# EAGLE board robot_general_purpose_board (EAGLE 7.1.0)
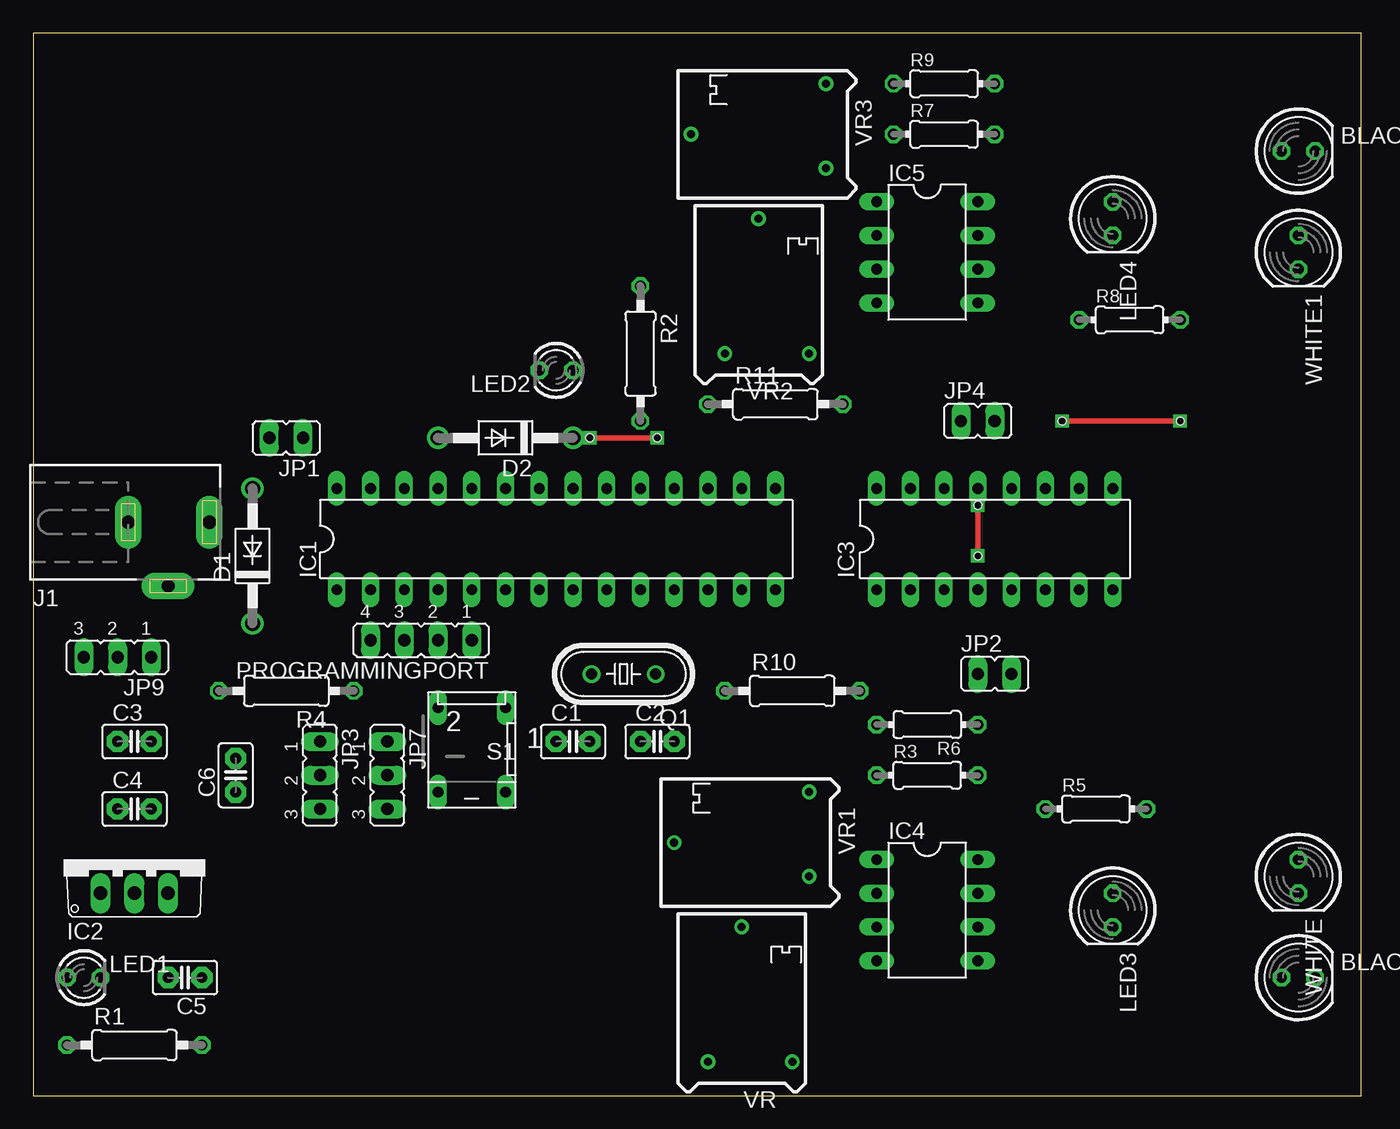
[diagram p0: board, top side]
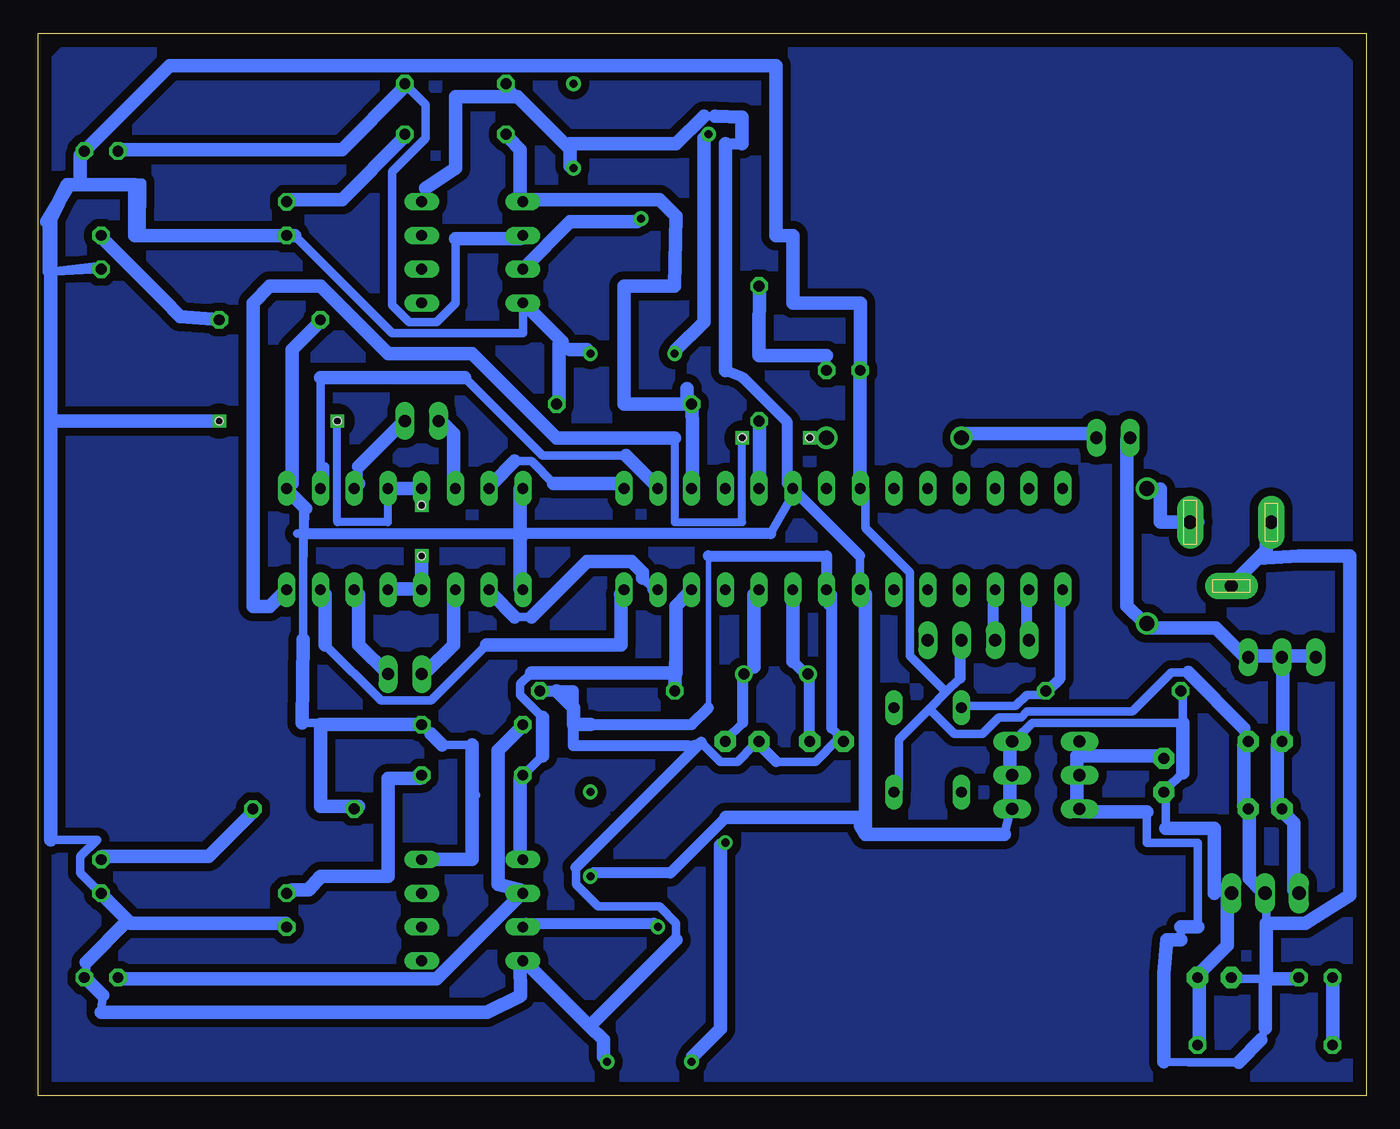
[diagram p1: board, bottom side, seen from below]

Size 100 x 80 mm. Coordinates in mm from the lower left corner, seen from the top.
Outline: 0,0 100,0 100,80 0,80 0,0
Copper layers (1*16): Top 0.035mm / dielectric 1.5mm / Bottom 0.035mm
Design rules "default *": minimum track width 25mil, minimum drill 24mil, track to track 8mil, track to pad 8mil, pad to pad 8mil, via to via 8mil, smd to smd 8mil, copper to edge 40mil, drill to drill 8mil, minimum pad ring 10mil, minimum via ring 8mil, stop-mask expansion 4mil, vias tented up to drill 0mil, thermal gap 10mil
Holes 0.6 mm at 41.91,49.53 46.99,49.53 71.12,44.45 71.12,40.64 77.47,50.8 86.36,50.8

## Footprints (pad centres in the part's own frame; a part is rotated, then mirrored left to right if it is on the bottom)
LED5MM = drill 0.813 octagon: A -1.27,0; K 1.27,0
C2.5-2 = drill 0.813 pad 1.6 octagon: 1 -1.27,0; 2 1.27,0
DO41-10 = drill 1.118: A 5.08,0; C -5.08,0
DIL28-3 = drill 0.813 long: 1 -16.51,-3.81; 2 -13.97,-3.81; 3 -11.43,-3.81; 4 -8.89,-3.81; 5 -6.35,-3.81; 6 -3.81,-3.81; 7 -1.27,-3.81; 8 1.27,-3.81; 9 3.81,-3.81; 10 6.35,-3.81; 11 8.89,-3.81; 12 11.43,-3.81; 13 13.97,-3.81; 14 16.51,-3.81; 15 16.51,3.81; 16 13.97,3.81; 17 11.43,3.81; 18 8.89,3.81; 19 6.35,3.81; 20 3.81,3.81; 21 1.27,3.81; 22 -1.27,3.81; 23 -3.81,3.81; 24 -6.35,3.81; 25 -8.89,3.81; 26 -11.43,3.81; 27 -13.97,3.81; 28 -16.51,3.81
TO220V = drill 1.016 long: 1 -2.54,-2.54; 2 0,-2.54; 3 2.54,-2.54
DIL16 = drill 0.813 long: 1 -8.89,-3.81; 2 -6.35,-3.81; 3 -3.81,-3.81; 4 -1.27,-3.81; 5 1.27,-3.81; 6 3.81,-3.81; 7 6.35,-3.81; 8 8.89,-3.81; 9 8.89,3.81; 10 6.35,3.81; 11 3.81,3.81; 12 1.27,3.81; 13 -1.27,3.81; 14 -3.81,3.81; 15 -6.35,3.81; 16 -8.89,3.81
DIL-08 = drill 0.813 long: 1 -3.81,-3.81; 2 -1.27,-3.81; 3 1.27,-3.81; 4 3.81,-3.81; 5 3.81,3.81; 6 1.27,3.81; 7 -1.27,3.81; 8 -3.81,3.81
DCJ0303 = drill 1 pad 2 long: 1 0,3.1; 2 4.8,0; 3 0,-3
JP1 = drill 0.914 long: 1 0,-1.27; 2 0,1.27
JP2 = drill 0.914 long: 1 -2.54,0; 2 0,0; 3 2.54,0
LED3MM = drill 0.813 octagon: A -1.27,0; K 1.27,0
JP4 = drill 0.914 long: 1 -3.81,0; 2 -1.27,0; 3 1.27,0; 4 3.81,0
HC49/S = drill 0.813: 1 -2.413,0; 2 2.413,0
0207/10 = drill 0.813 octagon: 1 -5.08,0; 2 5.08,0
0204/7 = drill 0.813 octagon: 1 -3.81,0; 2 3.81,0
DP-02 = drill 0.813 long: 1 -2.54,-2.54; 2 2.54,-2.54; 3 2.54,3.81; 4 -2.54,3.81
RTRIM64P = drill 0.61: 1 -2.54,-3.81; 2 7.62,0; 3 -2.54,2.54

## Placement (x,y rotation side)
BLACK  5mm  [LED5MM]  95.25,8.89 0 top
BLACK1  5mm  [LED5MM]  95.25,71.12 0 top
C1  22pf  [C2.5-2]  40.64,26.67 0 top
C2  22pf  [C2.5-2]  46.99,26.67 0 top
C3  470Uf  [C2.5-2]  7.62,26.67 0 top
C4  0.1uf  [C2.5-2]  7.62,21.59 0 top
C5  0.1uf  [C2.5-2]  11.43,8.89 180 top
C6  4.7uf  [C2.5-2]  15.24,24.13 90 top
D1  1N4007  [DO41-10]  16.51,40.64 90 top
D2  1N4007  [DO41-10]  35.56,49.53 180 top
IC1  ATMEGA328  [DIL28-3]  39.37,41.91 0 top
IC2  7805  [TO220V]  7.62,17.78 0 top
IC3  L293D  [DIL16]  72.39,41.91 0 top
IC4  358  [DIL-08]  67.31,13.97 270 top
IC5  358  [DIL-08]  67.31,63.5 270 top
J1  [DCJ0303]  10.16,43.18 270 top
JP1  [JP1]  19.05,49.53 90 top
JP2  [JP1]  72.39,31.75 270 top
JP3  0volt  [JP2]  21.59,24.13 270 top
JP4  [JP1]  71.12,50.8 270 top
JP7  +5v0lt  [JP2]  26.67,24.13 270 top
JP9  +12volt  [JP2]  6.35,33.02 180 top
LED1  [LED3MM]  3.81,8.89 0 top
LED2  [LED3MM]  39.37,54.61 180 top
LED3  5mm  [LED5MM]  81.28,13.97 270 top
LED4  5mm  [LED5MM]  81.28,66.04 270 top
PROGRAMMINGPORT  [JP4]  29.21,34.29 180 top
Q1  16MHZ  [HC49/S]  44.45,31.75 180 top
R1  220R  [0207/10]  7.62,3.81 0 top
R2  330R  [0207/10]  45.72,55.88 270 top
R3  1K  [0204/7]  67.31,24.13 0 top
R4  10K  [0207/10]  19.05,30.48 180 top
R5  1K  [0204/7]  80.01,21.59 0 top
R6  10K  [0204/7]  67.31,27.94 180 top
R7  1K  [0204/7]  68.58,72.39 0 top
R8  1K  [0204/7]  82.55,58.42 0 top
R9  10K  [0204/7]  68.58,76.2 0 top
R10  10K  [0207/10]  57.15,30.48 0 top
R11  10K  [0207/10]  55.88,52.07 0 top
S1  [DP-02]  33.02,26.67 180 top
VR  50k  [RTRIM64P]  53.34,5.08 90 top
VR1  100E  [RTRIM64P]  55.88,19.05 180 top
VR2  50k  [RTRIM64P]  54.61,58.42 90 top
VR3  100E  [RTRIM64P]  57.15,72.39 180 top
WHITE  5mm  [LED5MM]  95.25,16.51 270 top
WHITE1  5mm  [LED5MM]  95.25,63.5 270 top

## Library data of the parts
BLACK BLACK1 LED1-LED4 WHITE WHITE1 = led
C1-C6 = capacitor-wima
D1 D2 = diode
IC1 = quantum-research-group; OC_FARNELL: unknown; OC_NEWARK: unknown
IC2 = linear
IC3 = st-microelectronics; MPN: L293D; OC_FARNELL: 9589619; OC_NEWARK: 56P8249
IC4 IC5 = st-microelectronics; MF: Arrow Electronics; MPN: NE555N; OC_FARNELL: 1467742; OC_NEWARK: 89K1486
J1 = con-jack; OC_FARNELL: unknown; OC_NEWARK: unknown
JP1-JP4 JP7 JP9 PROGRAMMINGPORT = jumper
Q1 = crystal; OC_FARNELL: 1667008; OC_NEWARK: unknown
R1-R11 = rcl
S1 = switch-dil; MPN: MCDP02; OC_FARNELL: 1255233; OC_NEWARK: 26M1095
VR VR1-VR3 = resistor

## Nets
+5V: C5.1 C6.1 IC1.7 IC1.20 IC2.3 IC3.1 IC3.9 IC3.16 IC4.8 IC5.8 JP7.1 JP7.2 JP7.3 R1.2 R4.2 R5.1 R6.1 R8.1 R9.1 VR1.3 VR3.3
+12V: C3.1 C4.1 D1.C IC2.1 JP1.2 JP9.1 JP9.2 JP9.3
GND: BLACK1.K BLACK.K C1.1 C2.1 C3.2 C4.2 C5.2 C6.2 IC1.8 IC1.22 IC2.2 IC3.4 IC3.5 IC3.12 IC3.13 IC4.4 IC5.4 J1.2 J1.3 JP3.1 JP3.2 JP3.3 LED1.K LED2.K LED3.K LED4.K PROGRAMMINGPORT.2 R10.2 R11.2 S1.4 VR2.1 VR.1 WHITE1.K WHITE.K
N$1: C1.2 IC1.9 Q1.2
N$2: C2.2 IC1.10 Q1.1
N$3: D1.A J1.1
N$5: LED2.A R2.1
N$6: LED1.A R1.1
N$7: D2.C IC3.8
N$8: IC1.28
N$9: IC1.27
N$10: IC1.26
N$11: IC1.25
N$12: IC1.24
N$13: IC1.23
N$14: D2.A JP1.1
N$15: IC3.14 JP4.1
N$16: IC3.11 JP4.2
N$17: IC3.3 JP2.1
N$18: IC3.6 JP2.2
N$19: IC1.2 PROGRAMMINGPORT.4
N$20: IC1.12 IC4.1 R3.1 R10.1
N$21: R5.2 WHITE.A
N$22: BLACK.A IC4.2 R6.2
N$23: IC1.15 IC3.15
N$24: IC1.16 IC3.10
N$25: IC1.14 IC3.7
N$26: IC1.17 IC5.1 R7.1 R11.1
N$27: IC1.19 R2.2
N$28: IC4.3 VR.2
N$29: VR1.2 VR.3
N$30: IC1.3 PROGRAMMINGPORT.3
N$31: IC1.1 R4.1 S1.2
N$32: LED3.A R3.2
N$33: IC1.13 IC3.2
N$35: R8.2 WHITE1.A
N$36: BLACK1.A IC5.2 R9.2
N$37: IC5.3 VR2.2
N$38: VR2.3 VR3.2
N$40: LED4.A R7.2

## Tracks (layer width: path | path; a pad name or v marks a point on that pad's centre or on a via)
+5V
  Bottom 0.635: 67.31,22.63 67.02,22.63 67.03,22.62 67.31,22.86 | 69.57,26.4 67.31,26.4 | 70.83,18.02 IC4.8 | R6.1 70.83,27.66 70.41,27.24 R6.1 | 75.86,21.79 R5.1 | 63.7,38.14 IC3.1 | 63.7,45.68 IC3.16 | 80.89,46.1 IC3.9 81.31,45.68 | 78.8,58.24 R8.1 | 80.01,41.91 79.84,44.22 80.05,44.01 80.05,34.37 | 80.01,41.91 80.01,40.64 | 80.01,41.91 80.01,42.32 80.48,42.32 | 80.11,28.08 71.25,28.08 R6.1 | 13.83,24.31 15.09,23.05 C6.1 15.09,22.63 15.09,20.12 | R4.2 13.83,30.18 13.83,28.08 25.15,28.08 26.4,26.82 JP7.1 26.82,26.4 | 12.57,4.19 R1.2 | 12.57,8.8 C5.1 12.57,9.22 | 10.48,15.09 IC2.3 10.48,15.51 11.43,15.24 | 63.91,75.23 64.54,75.86 R9.1 | 59.93,71.25 60.14,71.46 59.93,71.67 | 59.93,69.99 VR3.3 | 70.83,68.31 70.83,67.47 IC5.8 | 38.14,40.65 38.14,38.14 IC1.7 37.72,37.72 | 43.17,45.68 IC1.20 | 26.82,24.31 JP7.2 26.82,23.89 | 27.24,19.68 26.82,21.37 JP7.3 26.82,21.79 | 58.26,16.76 VR1.3 | 49.03,73.76 49.87,73.76 | 46.94,71.67 46.99,71.67 | 43.59,46.1 IC1.20 | 44.84,42.32 43.17,45.26 IC1.20 | 63.5,42.32 63.5,41.91 63.7,42.32 63.5,42.32
  Bottom 0.813: 80.01,42.32 63.7,42.32 | 43.17,45.68 38.14,40.65 | 58.26,16.76 52.39,16.76 48.2,20.95 | 48.26,54.61 46.94,54.06 43.59,50.71 43.59,46.1 | 48.26,71.67 46.94,71.67 | 44.84,42.32 63.5,42.32
  Bottom 1.016: 67.31,22.63 67.31,17.78 IC4.8 | 67.31,26.4 67.31,22.86 | 70.41,27.24 69.57,26.4 | R6.1 78.74,27.94 78.74,21.79 75.86,21.79 | 63.7,45.68 63.7,42.32 63.7,38.14 | 80.89,46.1 80.89,56.16 78.8,58.24 | 81.31,45.68 79.84,44.22 | 80.05,34.37 80.11,28.08 | 13.83,24.31 13.83,28.08 | 12.57,8.8 12.57,4.19 | 10.48,15.09 10.48,11.32 12.57,9.22 | 11.43,15.24 11.43,20.12 15.09,20.12 | 59.93,71.25 59.93,69.99 | 60.14,71.46 63.91,75.23 68.58,75.23 68.58,69.85 70.83,68.31 | 26.82,26.4 26.82,24.31 | 27.24,19.68 37.72,19.68 | 37.72,19.68 38.1,20.32 38.1,20.95 48.2,20.95 | 26.82,21.79 26.82,23.89 | 37.72,19.68 37.72,37.72 | 59.93,71.67 51.97,71.67 49.87,73.76 | 46.99,71.67 46.99,73.66 49.03,73.76 | 48.26,54.61 48.26,71.67
+12V
  Bottom 0.635: 18.02,49.45 JP1.2 | 16.76,35.62 D1.C 16.34,35.2 | 4.19,33.11 JP9.3 | 6.29,33.11 JP9.2 | 8.8,33.11 JP9.1 9.22,33.11 | 6.71,33.11 JP9.2 | 5.45,15.51 IC2.1 | 6.29,21.37 C4.1 6.71,21.79 | 6.71,26.4 C3.1 6.29,26.82 | 6.29,32.69 JP9.2
  Bottom 1.016: 18.02,49.45 18.02,36.88 16.76,35.62 | 6.29,33.11 4.19,33.11 | 6.71,33.11 8.8,33.11 | 5.45,15.51 5.45,20.54 6.29,21.37 | 6.71,21.79 6.71,26.4 | 6.29,26.82 6.29,32.69 | 16.34,35.2 11.32,35.2 9.22,33.11
GND  (via drill 0.6)  (1 unrouted)
  Top 0.406: v71.12,40.64 v71.12,44.45 | v77.47,50.8 86.36,50.8
  Bottom 0.406: 71.25,45.68 71.21,45.72 IC3.13 | 49.53,29.21 49.53,40.64 | 40.64,36.83 IC1.8 | 71.25,38.14 arc-90 71.12,38.27 | 99.06,60.96 99.06,50.8
  Bottom 0.61: v77.47,50.8 77.47,43.18 73.66,43.18 IC3.12
  Bottom 0.635: IC3.13 71.25,45.68 73.34,45.68 IC3.12 | 38.14,46.1 IC1.22 37.72,45.68 37.72,42.75 34.37,39.4 34.37,33.11 31.64,30.39 | 38.14,54.48 LED2.K 38.14,54.9 38.1,54.9 | 30.59,31.43 31.64,30.39 | 31.64,30.39 32.9,29.13 | 32.9,29.13 35.2,26.82 35.2,23.05 S1.4 | 30.59,33.95 PROGRAMMINGPORT.2 | 21.79,21.79 JP3.3 21.37,21.37 | 21.79,23.89 JP3.2 21.79,24.31 | 21.79,25.57 21.79,26.4 JP3.1 | 15.51,25.57 C6.2 | 7.54,43.17 J1.3 | 10.06,38.56 J1.2 | 9.22,21.79 C4.2 8.8,21.37 | 9.22,26.4 C3.2 9.22,26.82 9.22,27.66 | 7.54,8.8 10.06,8.8 C5.2 10.48,8.8 7.62,8.8 | 5.45,8.8 LED1.K | 7.54,12.99 7.54,15.09 IC2.2 7.96,15.51 | 13.97,11.75 13.97,12.7 | 12.7,12.7 12.7,19.05 16.51,19.05 16.51,21.37 | 15.24,2.54 13.41,2.52 9.61,2.52 | 7.62,5.08 7.94,4.19 | 32.9,29.13 31.01,27.24 28.92,27.24 27.66,28.5 25.98,28.5 25.57,28.92 17.6,28.92 14.67,31.85 13.41,31.85 | 59.93,56.16 60.56,56.79 60.77,56.58 | 58.67,56.16 VR2.1 | 63.28,59.51 IC5.4 | 60.77,52.41 R11.2 | 99.35,65.81 99.36,62.01 95.56,62.45 WHITE1.K 99.36,62.03 99.06,66.04 | 97.79,68.35 97.79,68.58 96.81,68.76 92.18,68.76 92.19,64.96 81.31,64.96 LED4.K 80.89,64.96 80.7,64.77 73.34,57.42 63.5,57.42 IC5.4 | 96.81,70.83 BLACK1.K | IC5.4 63.66,59.51 63.7,59.51 IC5.4 | 40.23,27.66 39.4,26.82 C1.1 39.81,26.82 41.49,25.15 44.42,25.15 | 40.23,37.72 IC1.8 | 51.08,26.34 50.08,26.61 48.62,25.15 47.36,25.15 46.1,26.4 C2.1 45.68,26.4 | 57.42,2.93 VR.1 | 63.28,10.06 IC4.4 63.7,10.06 | 93.25,13.2 93.04,12.99 | 81.31,12.99 LED3.K | 95.14,15.09 WHITE.K 95.56,15.51 96.81,16.76 96.81,18.02 95.56,19.28 99.06,19.28 | 96.39,10.06 96.39,9.22 BLACK.K 96.39,8.8 | 95.14,7.54 95.25,6.35 95.25,6.27 | 59.51,17.18 59.51,15.93 57.84,14.25 53.23,14.25 51.97,12.99 51.97,11.73
  Bottom 0.635: 44.45,64.77 44.49,66.66 | 71.25,38.14 IC3.4 | 73.34,38.14 IC3.5
  Bottom 0.813: 30.59,33.95 30.59,31.43 | 40.23,27.66 40.23,37.72 | 51.08,26.34 59.69,26.34 59.69,29.21 59.69,30.48 60.96,30.48 R10.2 | 45.68,26.4 44.42,25.15 | 59.51,17.18 50.08,26.61 | 58.42,27.94 50.8,27.94 49.53,29.21 | 49.53,40.64 40.64,40.64 IC1.8
  Bottom 1.016: 38.14,54.48 38.14,46.1 | 21.79,23.89 21.79,21.79 | 21.79,24.31 21.79,25.57 15.51,25.57 | 7.54,43.17 7.54,41.07 8.17,40.44 | 10.06,38.56 8.17,40.44 | 9.22,26.4 9.22,21.79 | 5.45,8.8 7.54,8.8 7.54,12.99 4.61,12.99 1.25,15.09 1.25,40.64 5.08,40.64 8.17,40.44 | 8.8,21.37 8.8,16.34 7.96,15.51 | 13.97,11.75 15.02,11.75 15.24,9.21 15.24,2.54 | 13.97,12.7 12.7,12.7 | 16.51,21.37 21.37,21.37 | 7.94,4.19 9.61,2.52 | 7.62,8.8 7.62,5.08 | 9.22,27.66 13.41,31.85 | 59.93,56.16 58.67,56.16 | 63.28,59.51 60.56,56.79 | 60.77,56.58 60.77,52.41 | 96.81,70.83 96.81,68.76 | 97.79,68.35 99.35,65.81 | 57.42,2.93 57.42,4.19 58.46,5.24 | 63.28,10.06 58.46,5.24 | 93.04,12.99 81.31,12.99 | 95.14,15.09 93.25,13.2 96.39,10.06 | 63.7,10.06 63.66,7.52 66.18,6.27 95.25,6.27 | 96.39,8.8 95.14,7.54 | 58.46,5.24 51.97,11.73 | 99.06,19.28 99.06,60.96 99.06,66.04 97.79,68.58 92.71,68.58 92.71,64.77 80.7,64.77 | 38.1,54.9 38.1,59.69 43.18,59.69 43.18,64.77 44.45,64.77 44.45,77.53 90.11,77.53 BLACK1.K | 73.34,38.14 71.25,38.14 | 60.96,30.48 59.69,29.21 59.69,27.94 58.42,27.94 | 71.12,38.27 v71.12,40.64 | IC3.12 IC3.13 v71.12,44.45 | 99.06,50.8 86.36,50.8
N$1
  Bottom 0.635: 41.91,31.43 Q1.2 42.33,31.85 | 43.17,37.72 IC1.9
  Bottom 0.813: C1.2 41.91,31.43 | 42.33,31.85 43.17,32.69
  Bottom 1.016: 43.17,32.69 43.17,37.72
N$2
  Bottom 0.635: 46.94,28.08 48.2,26.82 C2.2 | 46.94,31.43 Q1.1 46.52,31.85 46.1,32.27 | 46.1,37.72 IC1.10
  Bottom 0.813: 46.94,28.08 46.94,31.43
  Bottom 1.016: 46.1,32.27 46.1,37.72
N$3
  Bottom 0.635: 15.51,45.68 16.34,45.68 | 13.41,43.59 J1.1
  Bottom 1.016: 13.41,43.59 12.7,43.18 15.51,43.18 15.51,45.68 | 16.34,45.68 D1.A
N$4  (via drill 0.6)
  other vias: 86.36,50.8
N$5
  Bottom 0.635: 40.65,55.74 40.65,54.9 | 45.68,60.77 R2.1
  Bottom 1.016: 45.68,60.77 45.72,57.15 45.72,55.74 40.65,55.74 | 40.65,54.9 LED2.A
N$6
  Bottom 0.635: 2.52,4.19 R1.1 | 2.52,8.8 LED1.A
  Bottom 1.016: 2.52,8.8 2.52,4.19
N$7  (via drill 0.6)
  Top 0.406: v46.99,49.53 v41.91,49.53
  Bottom 0.406: D2.C v41.91,49.53
  Bottom 0.61: 52.07,49.53 52.07,43.18 46.99,43.18 v46.99,49.53
  Bottom 1.016: IC3.8 82.55,36.83 83.82,36.83 83.82,59.69 82.55,60.96 78.74,60.96 73.66,55.88 67.31,55.88 60.96,49.53 52.07,49.53
N$14
  Bottom 0.635: 30.67,49.87 30.24,49.44 D2.A | 20.54,49.87 JP1.1
  Bottom 1.016: 30.67,49.87 20.54,49.87
N$15
  Bottom 0.635: 68.73,46.1 IC3.14 | 69.57,50.71 JP4.1
  Bottom 1.016: 68.73,46.1 68.73,49.87 69.57,50.71
N$16
  Bottom 0.635: 75.86,47.36 75.86,46.1 | 72.5,50.71 JP4.2
  Bottom 1.016: 72.5,50.71 75.86,47.36 | 75.86,46.1 IC3.11
N$17
  Bottom 0.635: 68.73,37.72 IC3.3 | 70.83,31.85 JP2.1
  Bottom 1.016: 68.73,37.72 68.73,33.95 70.83,31.85
N$18
  Bottom 0.635: 75.86,37.72 IC3.6
  Bottom 1.016: 75.86,37.72 75.86,33.95 JP2.2
N$19
  Bottom 0.635: 25.57,37.72 IC1.2 | 25.57,34.37 PROGRAMMINGPORT.4
  Bottom 0.813: 25.57,34.37 25.57,37.72
N$20
  Bottom 0.635: 51.13,37.72 IC1.12 | 63.7,18.02 IC4.1 | 63.7,23.89 R3.1 63.28,24.31 62.03,25.57 | 62.87,31.83 63.7,30.99 63.7,30.18 62.03,28.5
  Bottom 1.016: 51.97,33.11 51.97,36.88 51.13,37.72 | 51.97,33.11 51.97,31.83 62.87,31.83 | 51.97,33.11 R10.1 | 63.7,23.89 63.7,18.02 | 62.03,25.57 62.03,28.5
N$21
  Bottom 0.635: 95.14,18.02 WHITE.A | 83.82,21.37 R5.2
  Bottom 1.016: 95.14,18.02 87.17,18.02 83.82,21.37
N$22
  Bottom 0.635: 63.7,15.51 IC4.2 63.7,15.09 | 63.7,27.66 R6.2 | 93.88,8.8 BLACK.A
  Bottom 1.016: 63.7,15.51 65.38,15.91 65.38,25.98 63.7,27.66 | 93.88,8.8 69.99,8.8 63.7,15.09
N$23
  Bottom 0.635: 61.19,46.1 62.87,47.78 64.12,47.78 | 56.16,46.1 IC1.15 | 65.8,46.1 IC3.15
  Bottom 1.016: 61.19,46.1 56.16,46.1 | 65.8,46.1 64.12,47.78
N$24
  Bottom 0.635: 55.74,48.2 62.03,48.2 67.91,54.08 | IC3.10 78.37,47.36 78.37,46.1 IC3.10 | IC3.10 78.74,54.08 | 53.65,46.1 IC1.16
  Bottom 1.016: 55.74,48.2 53.65,46.1 | 78.74,54.08 67.91,54.08
N$25
  Bottom 0.635: 56.12,37.72 56.16,37.72 | 66.23,33.93 70.41,29.76 74.18,29.76 78.37,33.95 | 78.37,37.72 IC3.7
  Bottom 1.016: 56.12,37.72 56.1,33.93 66.23,33.93 | 78.37,37.72 78.37,33.95 | 56.16,37.72 IC1.14
N$26
  Bottom 0.635: 50.71,46.1 IC1.17 | 63.7,67.47 IC5.1 63.28,67.47 | 64.54,72.08 R7.1 | 51.13,52.07 51.13,52.41 R11.1
  Bottom 1.016: 50.71,46.1 50.71,50.72 R11.1 | 63.7,67.47 63.7,71.25 64.54,72.08 | 51.13,53.23 51.13,52.41 | 51.13,52.07 55.88,52.07 55.88,60.96 53.23,60.96 52.07,60.96 51.96,66.22 53.21,67.47 63.28,67.47
N$27
  Bottom 0.635: 45.68,46.1 IC1.19 | 45.68,50.71 R2.2
  Bottom 1.016: 45.68,50.71 45.68,46.1
N$28
  Bottom 0.635: 53.65,12.99 VR.2 | 63.28,12.99 IC4.3
  Bottom 0.813: 63.28,12.99 53.65,12.99
N$29
  Bottom 0.635: 48.62,18.86 VR1.2 | 50.71,2.93 VR.3
  Bottom 1.016: 48.62,18.86 48.62,5.03 50.71,2.93
N$30
  Bottom 0.635: 28.08,37.72 IC1.3 | 28.08,34.37 PROGRAMMINGPORT.3
  Bottom 0.813: 28.08,34.37 28.08,37.72
N$31
  Bottom 0.635: S1.2 30.18,29.34 26.4,29.34 25.57,30.18 24.31,30.18 R4.1 23.89,30.59 | 23.05,37.72 IC1.1
  Bottom 0.813: 23.05,37.72 23.05,31.43 23.89,30.59
N$32
  Bottom 0.635: 80.89,15.51 LED3.A | 71.25,23.89 R3.2
  Bottom 1.016: 80.89,15.51 79.63,15.51 78.74,16.51 73.66,16.51 73.66,23.89 71.25,23.89
N$33
  Bottom 0.635: 54.48,38.98 53.65,38.14 | 64.12,36.04 62.87,36.04 | 65.8,37.72 IC3.2
  Bottom 1.016: 54.48,38.98 54.48,39.4 55.32,40.23 58.67,40.23 62.87,36.04 | 65.8,37.72 64.12,36.04 | 53.65,38.14 IC1.13
N$34
  pour Bottom (isolate 0.61): 1.27,0 0,1.27 0,76.2 3.81,80.01 96.52,80.01 100.33,76.2 100.33,2.54 97.79,0
N$35
  Bottom 0.635: 95.14,64.54 WHITE1.A
  Bottom 1.016: 95.14,64.54 90.53,59.93 89.31,58.66 R8.2
N$36
  Bottom 0.635: 68.58,64.54 68.58,59.69 69.99,58.26 72.08,58.26 73.34,59.51 73.34,69.57 70.83,72.08 70.83,74.6 72.08,75.86 R9.2 72.5,75.86 | 63.7,64.54 IC5.2 | 93.88,71.25 BLACK1.A
  Bottom 1.016: 68.58,64.54 63.7,64.54 | 93.88,71.25 77.11,71.25 72.5,75.86
N$37
  Bottom 0.635: 54.9,65.8 VR2.2
  Bottom 1.016: 54.9,65.8 59.93,65.8 IC5.3
N$38
  Bottom 0.635: 49.87,72.08 VR3.2 | 51.97,56.16 VR2.3
  Bottom 1.016: 49.87,72.08 49.87,58.26 51.97,56.16
N$40
  Bottom 0.635: 80.89,67.47 LED4.A | 72.5,72.08 R7.2
  Bottom 1.016: 80.89,67.47 77.11,67.47 72.5,72.08